# EAGLE board PCB (EAGLE 9.7.0)
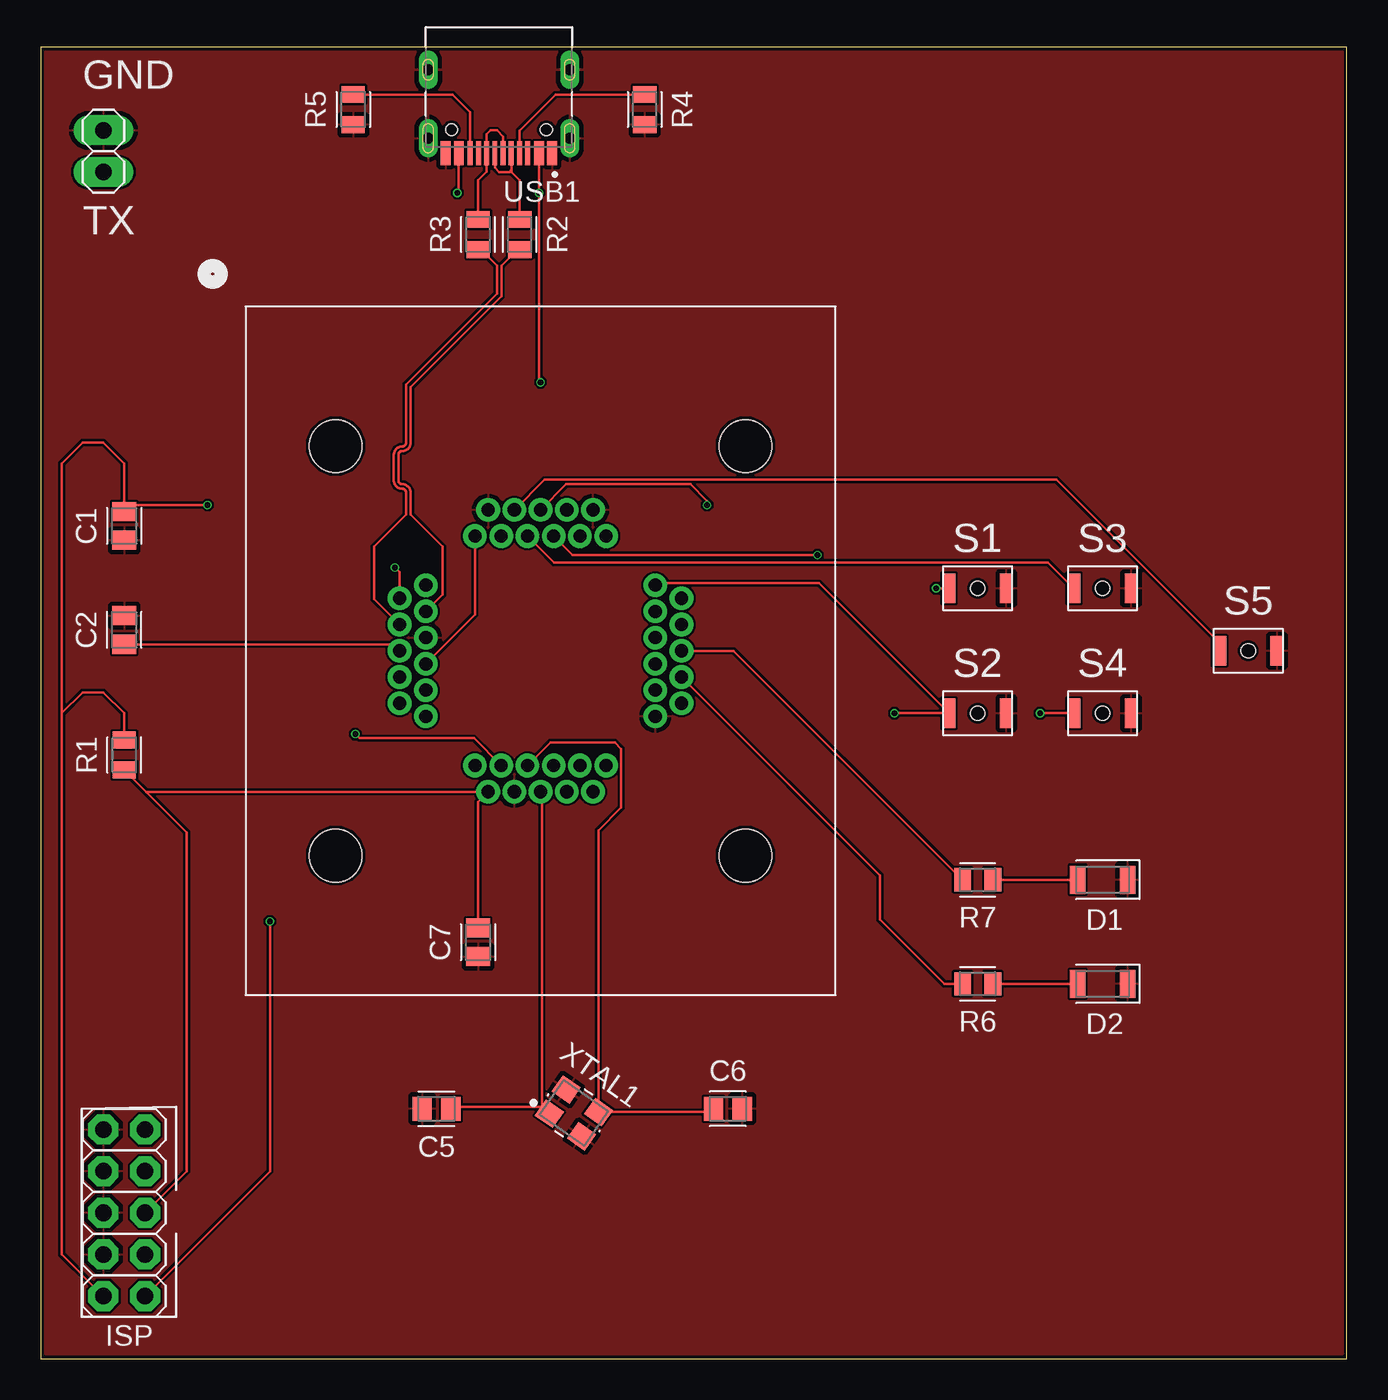
[diagram p0: board, top side]
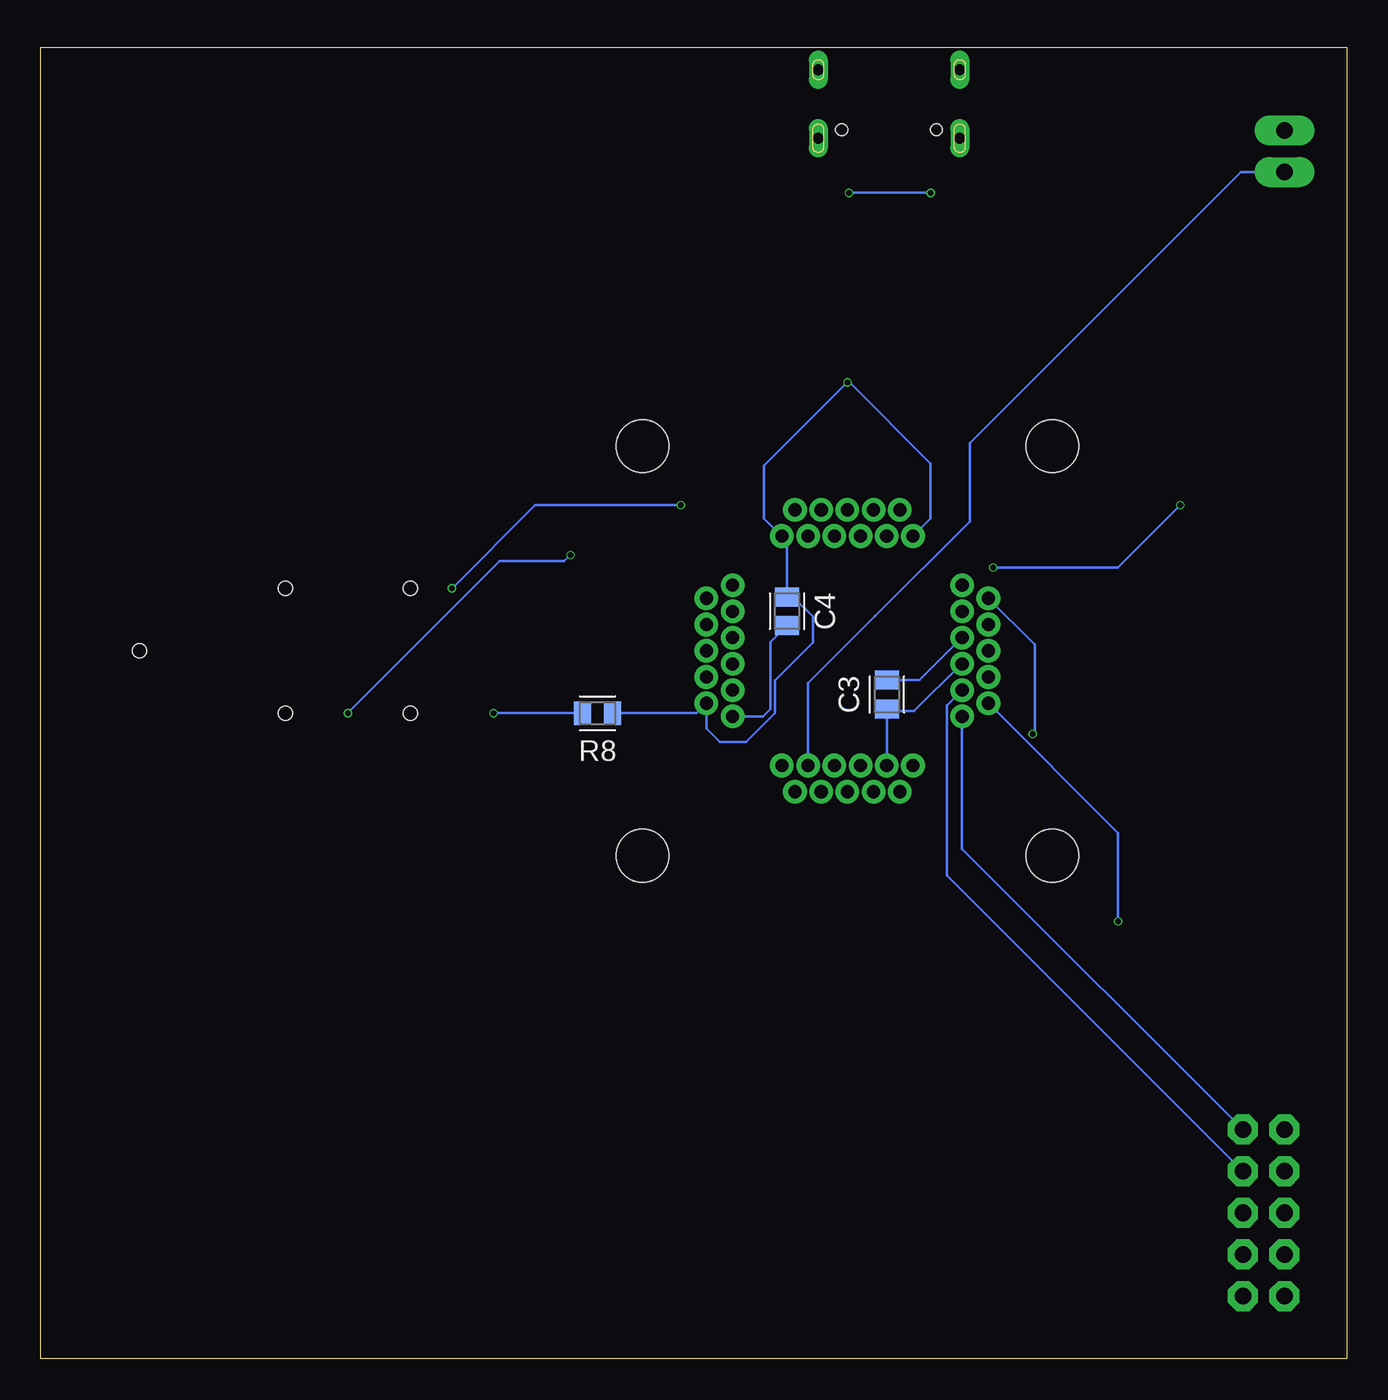
[diagram p1: board, bottom side, seen from below]

Size 79.68 x 80 mm. Coordinates in mm from the lower left corner, seen from the top.
Outline: 0,0 79.68,0 79.68,80 0,80 0,0
Copper layers (1*16): Top / Bottom
Stack-up Default Layer Stack: Top User Defined 0.035mm / Dielectric-1 User Defined 1.6mm / Bottom User Defined 0.035mm
Design rules: minimum drill size 0.3mm, minimum copper width 5mil, keepout clearance 0mil, drill distance 6mil, dimension clearance 0.2mm, restrict clearance 0mil, copper clearance wire_polygon to wire_polygon 5mil, copper clearance wire_polygon to pad_smd 5mil, copper clearance wire_polygon to via 5mil, copper clearance pad_smd to pad_smd 5mil, copper clearance pad_smd to via 5mil, copper clearance via to via 5mil, copper clearance smd to pad (same net) 5mil, copper clearance smd to via (same net) 5mil, copper clearance smd to smd (same net) 5mil

## Footprints (pad centres in the part's own frame; a part is rotated, then mirrored left to right if it is on the bottom)
CAPC2012X110 = smd 1.165 x 1.465: 1 -0.875,0; 2 0.875,0
LEDC3216X75N_FLAT-G = smd 0.962 x 1.712: A 1.525,0; C -1.525,0
LEDC3216X75N_FLAT-R = smd 0.962 x 1.712: A 1.525,0; C -1.525,0
2X05 = drill 1.016 octagon: 1 -5.08,-1.27; 2 -5.08,1.27; 3 -2.54,-1.27; 4 -2.54,1.27; 5 0,-1.27; 6 0,1.27; 7 2.54,-1.27; 8 2.54,1.27; 9 5.08,-1.27; 10 5.08,1.27
1X02 = drill 1.016 long: 1 -1.27,0; 2 1.27,0
RESC2012X65 = smd 1.031 x 1.42: 1 -0.919,0; 2 0.919,0
B3U-3000P(M)-B = smd 0.8 x 1.8: 1 -1.75,0; 2 1.75,0 | hole 0.85: 0,0
IC51-0444-467 = drill 0.8: P$1 -7,4; P$2 -8.6,3.2; P$3 -7,2.4; P$4 -8.6,1.6; P$5 -7,0.8; P$6 -8.6,0; P$7 -7,-0.8; P$8 -8.6,-1.6; P$9 -7,-2.4; P$10 -8.6,-3.2; P$11 -7,-4; P$12 -4,-7; P$13 -3.2,-8.6; P$14 -2.4,-7; P$15 -1.6,-8.6; P$16 -0.8,-7; P$17 0,-8.6; P$18 0.8,-7; P$19 1.6,-8.6; P$20 2.4,-7; P$21 3.2,-8.6; P$22 4,-7; P$23 7,-4; P$24 8.6,-3.2; P$25 7,-2.4; P$26 8.6,-1.6; P$27 7,-0.8; P$28 8.6,0; P$29 7,0.8; P$30 8.6,1.6; P$31 7,2.4; P$32 8.6,3.2; P$33 7,4; P$34 4,7; P$35 3.2,8.6; P$36 2.4,7; P$37 1.6,8.6; P$38 0.8,7; P$39 0,8.6; P$40 -0.8,7; P$41 -1.6,8.6; P$42 -2.4,7; P$43 -3.2,8.6; P$44 -4,7 | hole 3.2: 12.5,-12.5; -12.5,-12.5; -12.5,12.5; 12.5,12.5
TYPE-C-31-M-12 = smd 0.6 x 1.45: A1B12 3.25,-3.825; A4B9 2.45,-3.825; B1A12 -3.25,-3.825; B4A9 -2.45,-3.825 | smd 0.3 x 1.45: A5 1.25,-3.825; A6 0.25,-3.825; A7 -0.25,-3.825; A8 -1.25,-3.825; B5 -1.75,-3.825; B6 -0.75,-3.825; B7 0.75,-3.825; B8 1.75,-3.825 | drill 0.65 pad 1.05 long: S1 -4.32,1.27; S2 4.32,1.27; S3 -4.32,-2.91; S4 4.32,-2.91 | hole 0.7: 2.89,-2.38; -2.89,-2.38
OSCCC320X250X69N = smd 1.317 x 1.217: 1 -1.2,-0.9; 2 1.2,-0.9; 3 1.2,0.9; 4 -1.2,0.9

## Placement (x,y rotation side)
C1  10uF  [CAPC2012X110]  5.08,50.8 90 top
C2  1uF  [CAPC2012X110]  5.08,44.45 270 top
C3  100nF  [CAPC2012X110]  28.07,40.51 270 bottom
C4  100nF  [CAPC2012X110]  34.16,45.59 90 bottom
C5  10pF  [CAPC2012X110]  24.13,15.24 180 top
C6  10pF  [CAPC2012X110]  41.91,15.24 0 top
C7  100nF  [CAPC2012X110]  26.67,25.4 90 top
D1  GREEN  [LEDC3216X75N_FLAT-G]  64.77,29.21 180 top
D2  RED  [LEDC3216X75N_FLAT-R]  64.77,22.86 180 top
ISP  PINHD-2X5  [2X05]  5.08,8.89 90 top
JP1  PINHD-1X2  [1X02]  3.81,73.66 90 top
R1  10K  [RESC2012X65]  5.08,36.83 270 top
R2  22  [RESC2012X65]  29.21,68.58 270 top
R3  22  [RESC2012X65]  26.67,68.58 270 top
R4  5K1  [RESC2012X65]  36.83,76.2 90 top
R5  5K1  [RESC2012X65]  19.05,76.2 90 top
R6  150  [RESC2012X65]  57.15,22.86 180 top
R7  150  [RESC2012X65]  57.15,29.21 180 top
R8  10K  [RESC2012X65]  45.72,39.37 180 bottom
S1  B3U-3000P(M)-B  [B3U-3000P(M)-B]  57.15,46.99 0 top
S2  B3U-3000P(M)-B  [B3U-3000P(M)-B]  57.15,39.37 0 top
S3  B3U-3000P(M)-B  [B3U-3000P(M)-B]  64.77,46.99 0 top
S4  B3U-3000P(M)-B  [B3U-3000P(M)-B]  64.77,39.37 0 top
S5  B3U-3000P(M)-B  [B3U-3000P(M)-B]  73.66,43.18 0 top
U11  ATMEGA32U4SOCKET  [IC51-0444-467]  30.48,43.18 0 top
USB1  TYPE-C-31-M-12  [TYPE-C-31-M-12]  27.94,77.36 0 top
XTAL1  10pF  [OSCCC320X250X69N]  32.51,14.99 325 top

## Library data of the parts
C1-C7 = Capacitor; CATEGORY: Capacitor
D1 = LED; CATEGORY: LED; COLOR: GREEN; DESCRIPTION: CHIP LED FLAT; SUB-CATEGORY: CHIP; TYPE: FLAT_TOP
D2 = LED; CATEGORY: LED; COLOR: RED; DESCRIPTION: CHIP LED FLAT; SUB-CATEGORY: CHIP; TYPE: FLAT_TOP
ISP = Connector; CATEGORY: Headers; DESCRIPTION: Header, Straight, 2x5 Position; MANUFACTURER: Generic; MPN: Generic; OPERATING_TEMPERATURE: Generic; PART_STATUS: Active; PITCH: 0.100" (2.54mm); ROHS_COMPLIANCE: Generic; SERIES: Generic; SUB-CATEGORY: Headers, Male Pins; TYPE: Board to Board or Cable, Unshrouded, Through Hole, Straight
JP1 = Connector; CATEGORY: Headers; DESCRIPTION: Header, Straight, 2 Position; MANUFACTURER: Generic; MPN: Generic; OPERATING_TEMPERATURE: Generic; PART_STATUS: Active; PITCH: 0.100" (2.54mm); ROHS_COMPLIANCE: Generic; SERIES: Generic; SUB-CATEGORY: Headers, Male Pins; TYPE: Board to Board or Cable, Unshrouded, Through Hole, Straight
R1-R8 = Resistor; CATEGORY: Resistor; SUB-CATEGORY: Fixed
S1-S5 = Switch; CATEGORY: SWITCH; DESCRIPTION: Ultra-small Surface-mounting Tactile Switches with High Contact Reliability; MANUFACTURER: OMRON; OPERATING_TEMPERATURE: -25°C to +70°C; PART_STATUS: ACTIVE; ROHS_COMPLIANCE: RoHS Compliant; SERIES: B3U; TYPE: Tactile
U11 USB1 XTAL1 = _GMLib

## Nets
D2_N: R2.2 U11.P$3
D2_P: R3.2 U11.P$4
D_N: R2.1 USB1.A7 USB1.B7
D_P: R3.1 USB1.A6 USB1.B6
GND: C1.1 C2.1 C3.1 C4.1 C5.2 C6.2 C7.1 D1.C D2.C ISP.4 ISP.6 ISP.8 ISP.10 JP1.2 R4.1 R5.1 S1.2 S2.2 S3.2 S4.2 S5.2 U11.P$5 U11.P$15 U11.P$23 U11.P$35 U11.P$43 USB1.A1B12 USB1.B1A12 USB1.S1 USB1.S2 USB1.S3 USB1.S4 XTAL1.2 XTAL1.4
MISO: ISP.9 U11.P$11
MOSI: ISP.1 U11.P$10
N$1: R6.2 U11.P$26
N$2: D2.A R6.1
N$3: C2.2 U11.P$6
N$4: R7.2 U11.P$28
N$6: R4.2 USB1.A5
N$7: R5.2 USB1.B5
N$8: D1.A R7.1
N$11: JP1.1 U11.P$20
RST: C7.2 ISP.5 R1.2 U11.P$13
SCK: ISP.7 U11.P$9
SW1: S1.1 U11.P$39
SW2: R8.2 S2.1 U11.P$33
SW3: S3.1 U11.P$40
SW4: S4.1 U11.P$38
SW5: S5.1 U11.P$41
VCC: C1.2 C3.2 C4.2 ISP.2 R1.1 R8.1 U11.P$2 U11.P$7 U11.P$14 U11.P$24 U11.P$34 U11.P$44 USB1.A4B9 USB1.B4A9
XTAL1: C5.1 U11.P$17 XTAL1.1
XTAL2: C6.1 U11.P$16 XTAL1.3

## Tracks (layer width: path | path; a pad name or v marks a point on that pad's centre or on a via)
D2_N
  Top 0.152: U11.P$3 24.51,46.61 24.51,49.53 22.55,51.49 22.55,52.83 arc90 22.04,53.35 arc-90 21.81,53.58 21.81,55.13 arc-90 22.04,55.37 arc90 22.55,55.88 22.55,59.27 28.09,64.81 28.09,66.67 29.08,67.66 R2.2
D2_P
  Top 0.152: U11.P$4 20.32,46.34 20.32,49.53 22.28,51.49 22.28,52.83 arc90 22.04,53.07 arc-90 21.53,53.58 21.53,55.13 arc-90 22.04,55.65 arc90 22.28,55.88 22.28,59.42 27.81,64.96 27.81,66.67 26.83,67.66 R3.2
D_N
  Top 0.152: USB1.B7 28.7,73.52 28.7,72.52 | 28.7,72.52 28.7,72.39 29.21,71.88 R2.1 | USB1.A7 27.69,72.64 27.94,72.39 28.58,72.39 28.7,72.52
D_P
  Top 0.152: R3.1 26.67,71.88 27.19,72.4 USB1.B6 27.19,74.69 27.43,74.93 27.81,74.93 28.19,74.55 USB1.A6
GND
  Bottom 0.152: U11.P$5 26.07,41.39 C3.1 | C4.1 35.18,43.7 35.18,39.62 35.62,39.18 U11.P$23
  pour Top: -11.43,86.36 -11.43,-5.08 87.63,-5.08 87.63,86.36
MISO
  Bottom 0.152: ISP.9 23.48,31.1 U11.P$11
MOSI  (via drill 0.35)
  Top 0.152: v13.97,26.67 13.97,11.43 ISP.1
  Bottom 0.152: v13.97,26.67 13.97,32.07 U11.P$10
N$1
  Top 0.152: U11.P$26 51.18,29.48 51.18,26.8 55.12,22.86 R6.2
N$2
  Top 0.152: R6.1 D2.A
N$3
  Top 0.152: C2.2 21.48,43.58 U11.P$6
N$4
  Top 0.152: U11.P$28 42.26,43.18 R7.2
N$6
  Top 0.152: USB1.A5 29.19,74.91 31.4,77.12 R4.2
N$7
  Top 0.152: USB1.B5 26.19,76.05 25.12,77.12 R5.2
N$8
  Top 0.152: R7.1 D1.A
N$11
  Bottom 0.152: U11.P$20 32.88,41.2 28.79,45.3 23.02,51.07 23.02,55.84 6.46,72.39 JP1.1
RST
  Top 0.152: R1.2 6.41,34.58 | 6.41,34.58 U11.P$13 26.67,33.97 C7.2 | ISP.5 8.89,11.43 8.89,32.1 6.41,34.58
SCK
  Bottom 0.152: ISP.7 24.4,29.48 24.4,39.37 24.4,39.56 24.4,39.86 U11.P$9
SW1  (via drill 0.35)
  Top 0.152: S1.1 v54.61,46.99 | v40.64,52.07 40.64,52.32 39.62,53.34 32.04,53.34 U11.P$39
  Bottom 0.152: v54.61,46.99 49.53,52.07 v40.64,52.07
SW2  (via drill 0.35)
  Top 0.152: U11.P$33 37.6,47.3 47.47,47.3 S2.1 v52.07,39.37
  Bottom 0.152: R8.2 v52.07,39.37
SW3
  Top 0.152: U11.P$40 31.29,48.57 61.44,48.57 S3.1
SW4  (via drill 0.35)
  Top 0.152: v60.96,39.37 S4.1 | U11.P$38 32.44,49.02 v47.37,49.02
  Bottom 0.152: v60.96,39.37 51.69,48.64 47.75,48.64 v47.37,49.02
SW5
  Top 0.152: S5.1 71.91,43.66 61.95,53.62 30.72,53.62 U11.P$41
VCC  (via drill 0.35)
  Top 0.152: ISP.2 1.27,6.35 1.27,39.37 | 1.27,39.37 2.54,40.64 3.81,40.64 5.08,39.37 R1.1 | 1.27,39.37 1.27,54.61 2.54,55.88 3.81,55.88 5.08,54.61 C1.2 5.48,52.07 v10.16,52.07 | U11.P$2 21.88,47.97 v21.59,48.26 | USB1.A4B9 v30.39,71.12 30.39,59.65 v30.48,59.56 | USB1.B4A9 25.49,71.21 v25.4,71.12 | U11.P$7 26.48,45.38 U11.P$44 | v19.18,38.1 19.43,37.85 26.41,37.85 U11.P$14
  Bottom 0.152: C3.2 28.08,39.62 28.08,39.5 | 28.08,39.5 U11.P$14 | v21.59,48.26 13.97,48.26 v10.16,52.07 | U11.P$44 25.4,51.26 25.4,54.61 30.35,59.56 v30.48,59.56 35.56,54.48 35.56,51.26 U11.P$34 34.16,49.86 C4.2 33.8,46.47 32.59,45.26 32.59,43.67 34.9,41.36 34.9,39.38 36.66,37.62 38.26,37.62 39.08,38.45 U11.P$24 39.69,39.37 R8.1 | U11.P$7 23.53,42.38 26.42,39.5 28.08,39.5 | v25.4,71.12 v30.39,71.12 | U11.P$2 19.05,43.55 19.05,38.23 v19.18,38.1
XTAL1
  Top 0.152: U11.P$17 30.56,34.5 30.56,15.39 30.59,15.36 | 30.59,15.36 XTAL1.1 | C5.1 25.12,15.36 30.59,15.36
XTAL2
  Top 0.152: U11.P$16 31.09,37.59 35.01,37.59 35.4,37.2 35.4,33.62 34.01,32.23 XTAL1.3 40.83,15.04 C6.1

## Text on the board
SilkscreenTop: GND | TX